# Altium PCB ChargeControl.PcbDoc
Units mm, origin at the board's own origin, x right, y up, seen from the top; angles counter-clockwise.
Board outline 97.57 x 83.47 mm, 2 copper layers (Top Layer, Bottom Layer); 27 components, 20 nets, 84 pads, 21 vias.
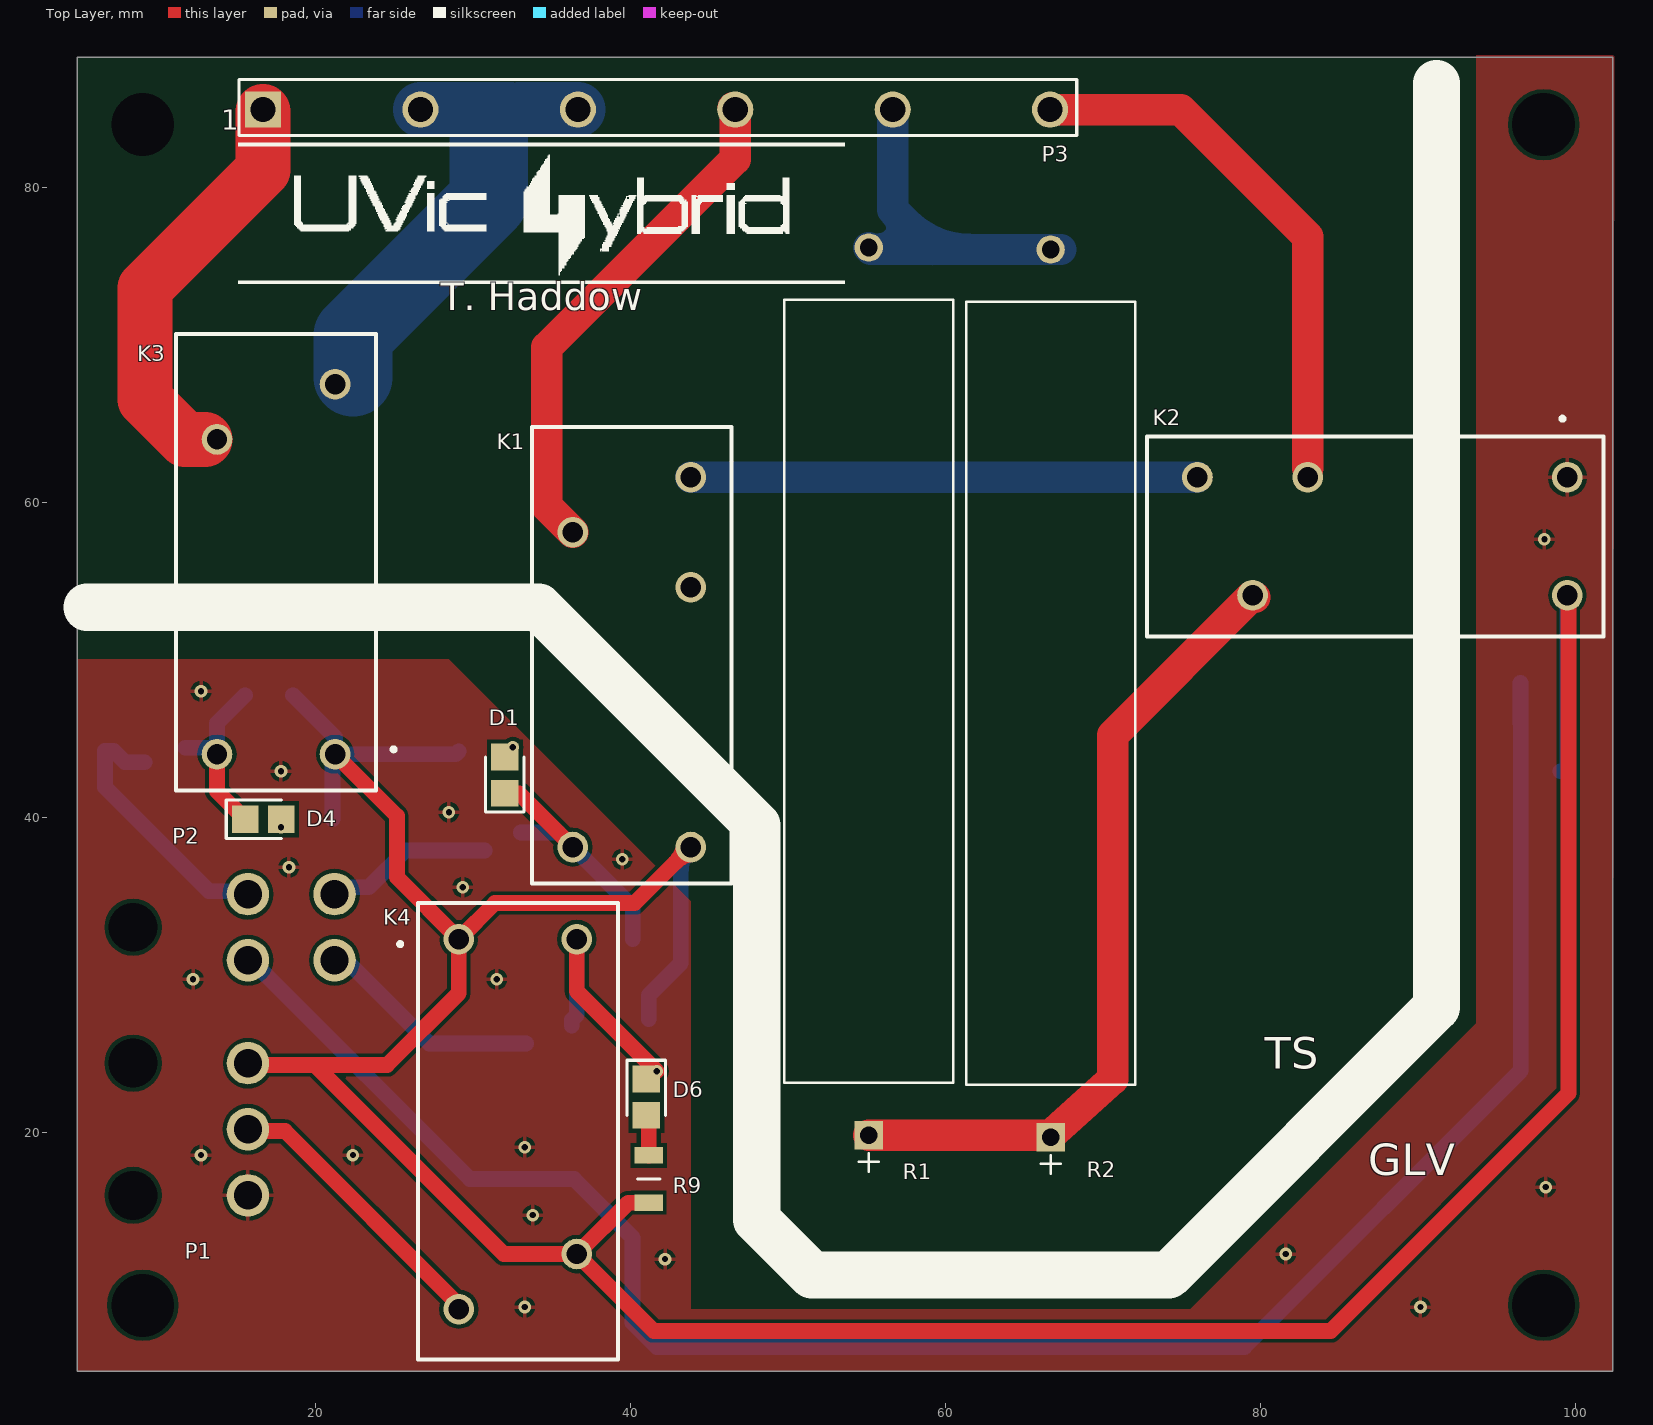
[diagram p0: Top Layer view]
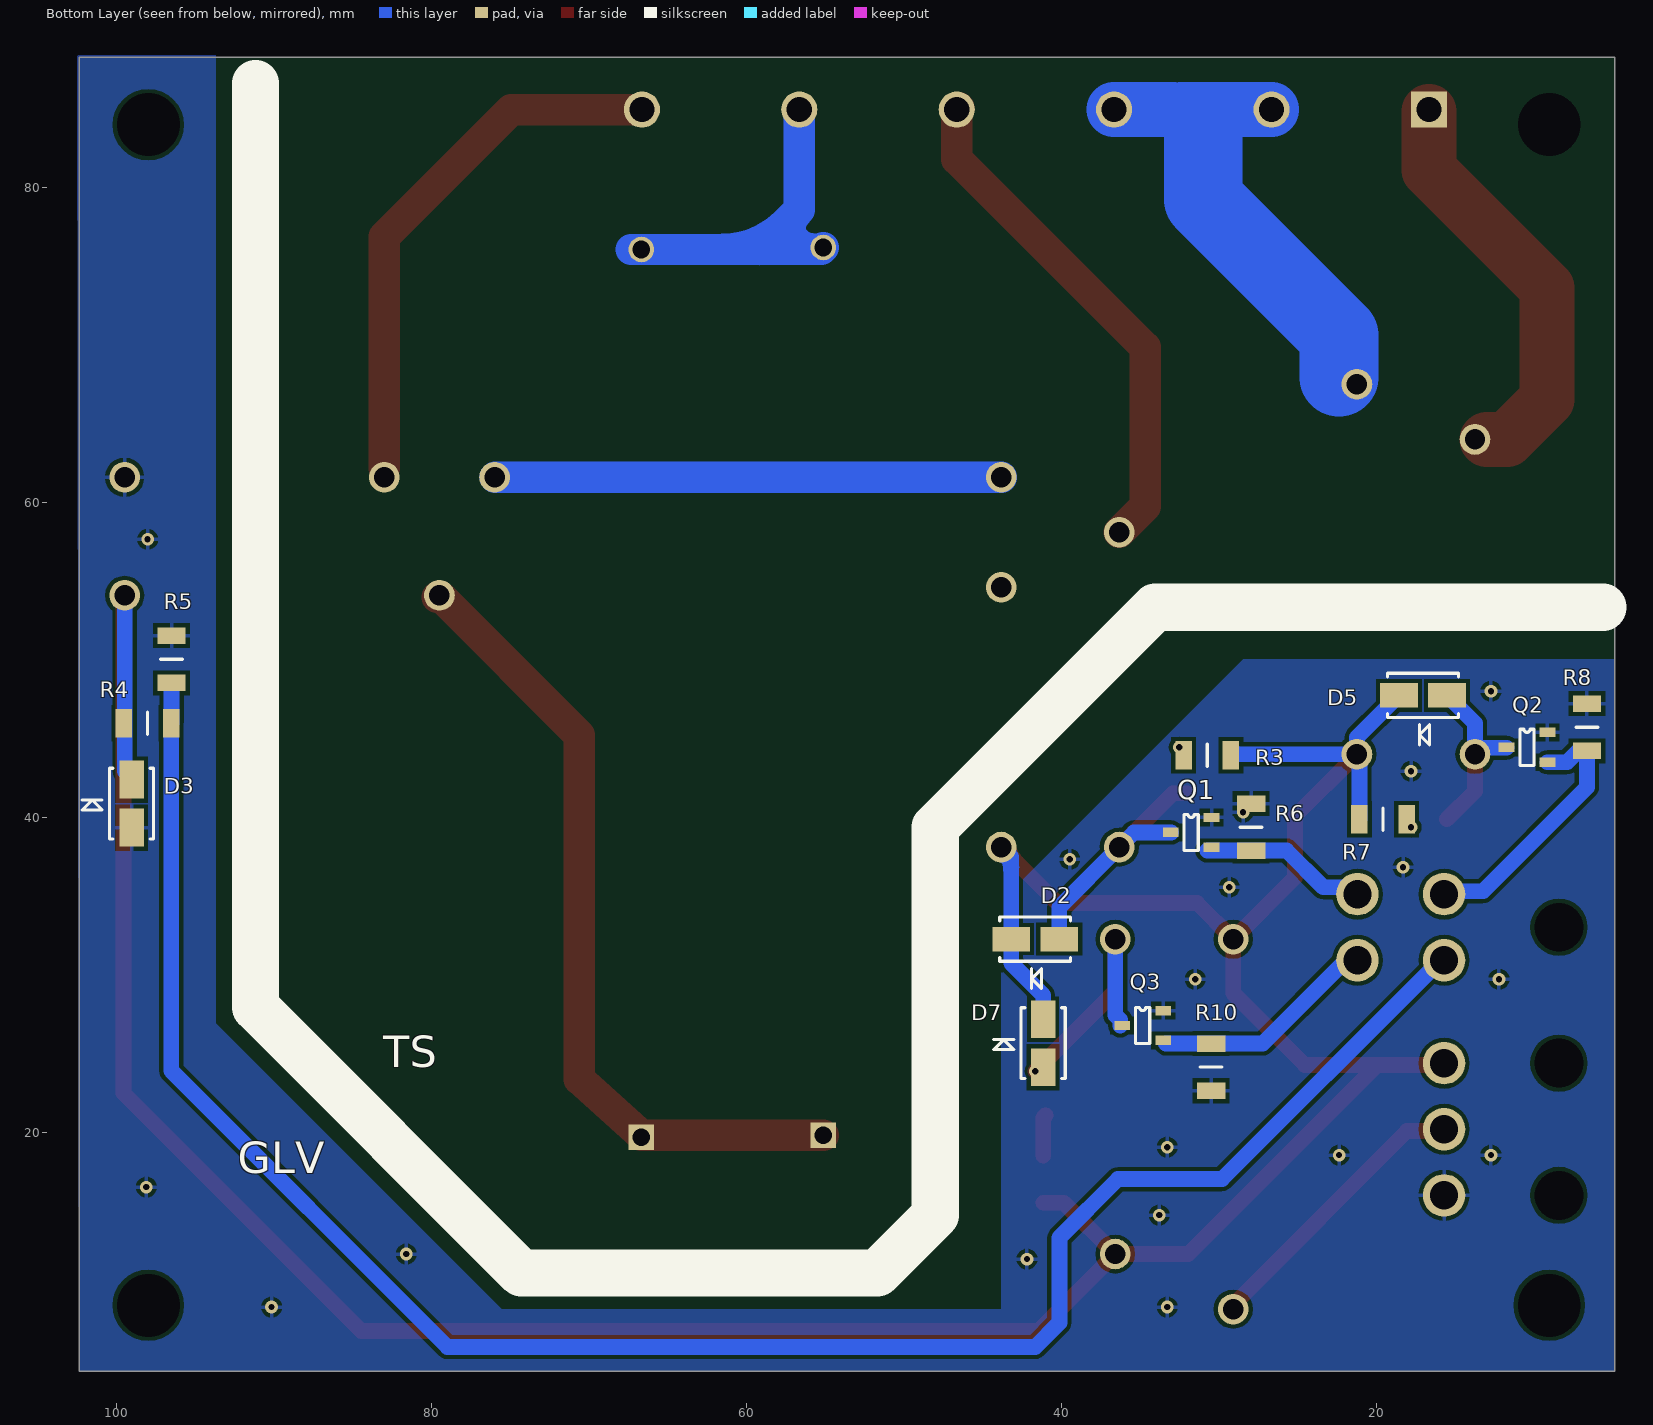
[diagram p1: Bottom Layer view, seen from below]
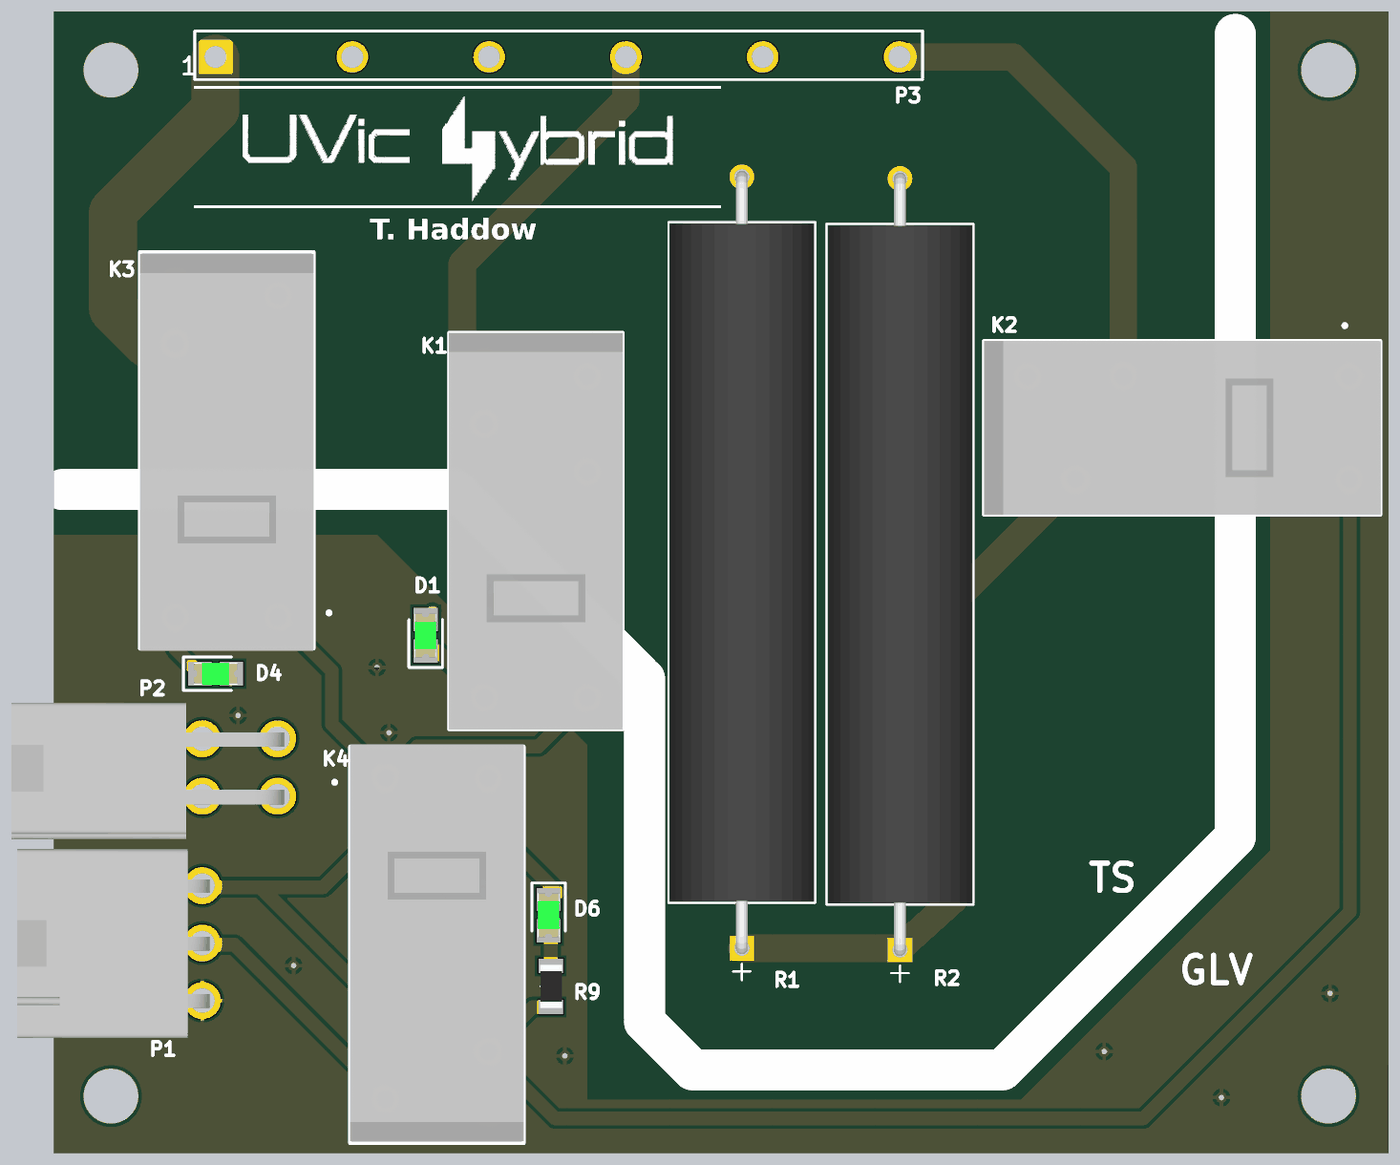
[diagram p2: 3D render of the assembled board from above, using the file's embedded part models]
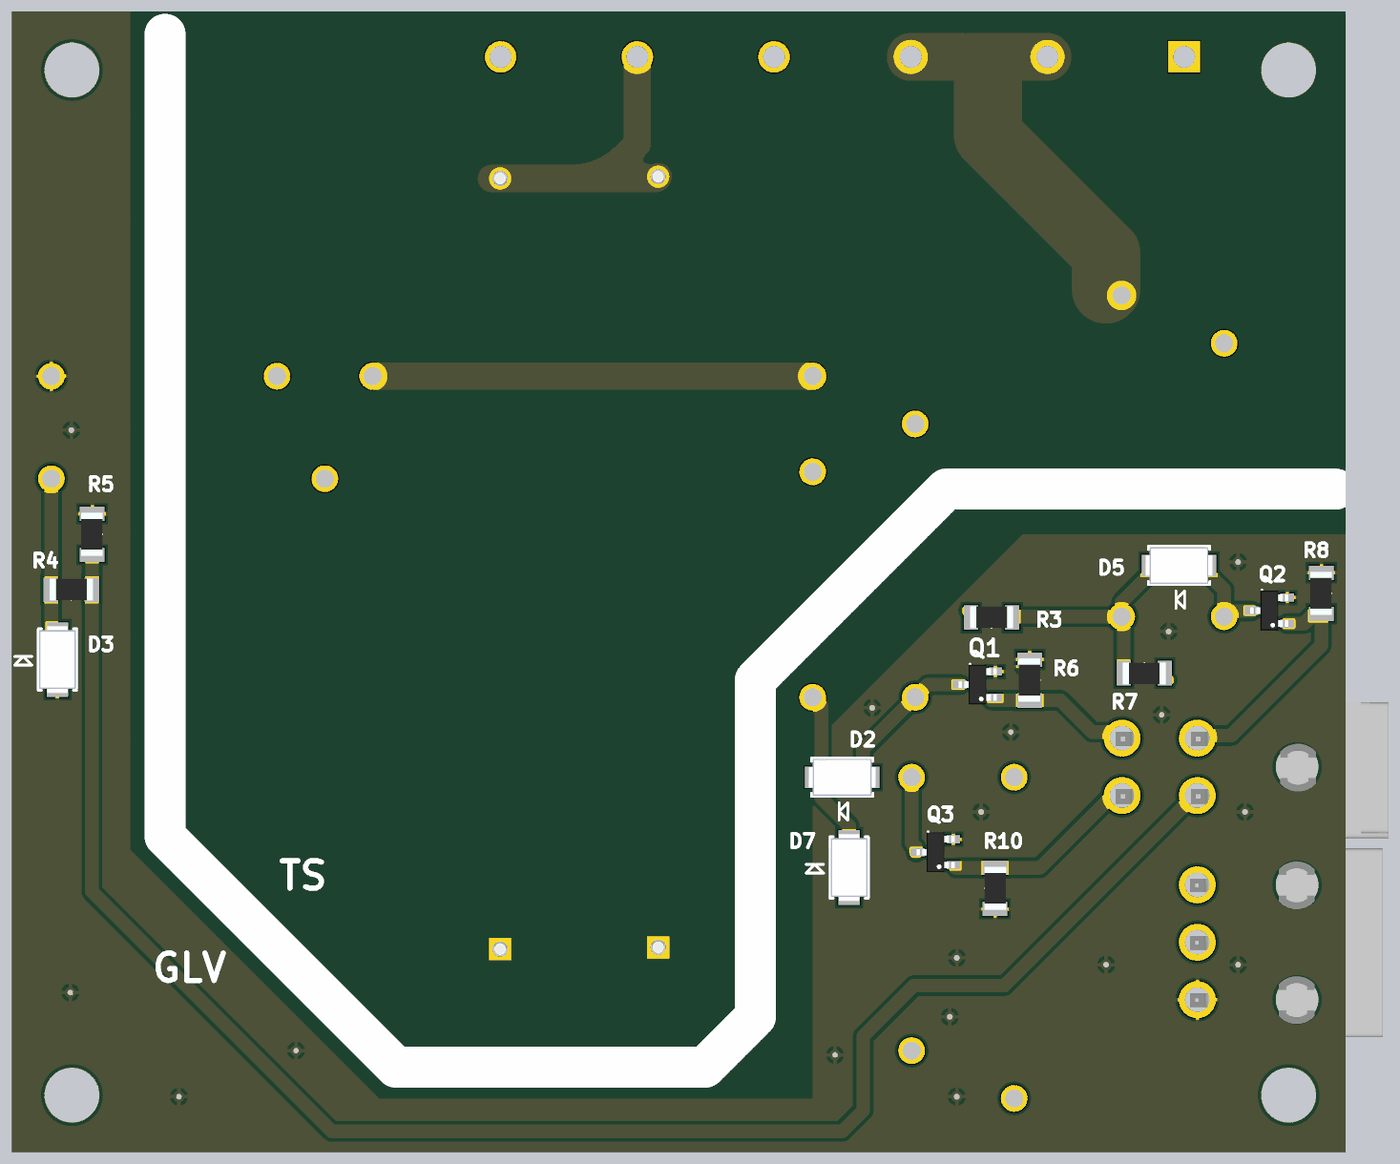
[diagram p3: 3D render of the assembled board from below, using the file's embedded part models]

## Layer stack, top to bottom
Top Solder: solder mask 0.0102, Solder Resist, Dk 3.5
Top Layer: signal copper 0.0356
Dielectric 1: dielectric 0.32, FR-4, Dk 4.8
Bottom Layer: signal copper 0.0356
Bottom Solder: solder mask 0.0102, Solder Resist, Dk 3.5

## Board outline
4.826,4.826 4.826,88.298 102.396,88.298 102.396,4.826

## Design rules (kind name [scope] priority, off if disabled: settings)
Clearance [All] p1: gap=0.254 ignorepadtopadclearanceinfootprint=FALSE except(0: Arc-Hole Track-Hole SMDPad-Hole THPad-Hole Via-Hole Fill-Hole Poly-Hole Region-Hole Text-Hole)
HoleSize [All] p1: absolutevalues=TRUE maxlimit=5 minlimit=0.3 maxpercent=80.000 minpercent=20.000
MinimumSolderMaskSliver [All] p1: minsoldermaskwidth=0.15
PolygonConnect [All] p1: connectstyle=Relief reliefconductorwidth=0.254 reliefentries=4 polygonreliefangle="90 Angle" airgapwidth=0.254
RoutingVias [All] p1: holewidth=0.711 width=1.27 viastyle="Through Hole" minholewidth=0.711 minwidth=1.27 maxholewidth=0.711 maxwidth=1.27
SilkToSilkClearance [All] p1: silktosilkclearance=0.1
SilkToSolderMaskClearance [IsPad] p1: minsilkscreentomaskgap=0.1 clearancetoexposedcopper=TRUE
SolderMaskExpansion [All] p1: expansion=0.1
Width [All] p1: maxlimit=5 minlimit=1 preferedwidth=2 minimp=50.000000 maximp=50.000000 favimp=50.000000
26 further rules are at their usual default settings.

## Components (designator, comment, footprint, x,y, rotation, side; value= is the part's Value field where it differs from the comment)
D1 "LED0" LEDC3216X120NGRN 32.004,42.679 r90 top
D2 "Diode" VISH-DO-214AC-SMA-2_N 41.656,32.258 r0 bottom
D3 "Diode" VISH-DO-214AC-SMA-2_N 99.06,40.87 r90 bottom
D4 "LED0" LEDC3216X120NGRN 16.653,39.878 r0 top
D5 "Diode" VISH-DO-214AC-SMA-2_N 17.018,47.752 r0 bottom
D6 "LED0" LEDC3216X120NGRN 40.994,22.222 r270 top
D7 "Diode" VISH-DO-214AC-SMA-2_N 41.148,25.654 r90 bottom
K1 "Relay-SPDT" G2RL14 46.415,35.81 r90 top
K2 "Relay-SPDT" G2RL14 101.802,64.202 r180 top
K3 "Relay-SPST" G2RL1ADC12 23.816,41.708 r90 top
K4 "Relay-SPST" G2RL1ADC12 26.476,34.558 r270 top
P1 "Header 3" Conn3pin 8.382,24.384 r270 top
P2 "Header 4H" Conn4pin 15.682,35.12 r270 top
P3 "Header 6" Conn6pin 16.642,84.963 r0 top
Q1 "MOSFET-N" SOT23-3 31.75,39.04 r270 bottom
Q2 "MOSFET-N" SOT23-3 10.414,44.45 r270 bottom
Q3 "MOSFET-N" SOT23-3 34.828,26.775 r270 bottom
R1 "Res1" YAG_SQP10 55.118,76.2 r90 top value=1K
R2 "Res1" YAG_SQP10 66.675,76.073 r90 top value=1K
R3 "1206" RESC3216X60N 30.722,43.942 r0 bottom value=500
R4 "Res3" RESC3216X60N 98.044,45.974 r0 bottom value=698K
R5 "Res3" RESC3216X60N 96.52,50.038 r270 bottom value=499K
R6 "1206" RESC3216X60N 27.94,39.37 r270 bottom value=1M
R7 "1206" RESC3216X60N 19.558,39.878 r180 bottom value=500
R8 "1206" RESC3216X60N 6.604,45.72 r270 bottom value=1M
R9 "1206" RESC3216X60N 41.148,17.018 r90 top value=500
R10 "1206" RESC3216X60N 30.48,24.13 r90 bottom value=1M

## Footprints (in the part's own frame and the unit in brackets; to place one, negate y for a bottom-side part, rotate by r counter-clockwise, add the part's x,y. Pads: shape width x height; smd on the part's side, far side on the other; paste and mask are expansions set on the pad)
Conn3pin [mm]
  round 2.7 hole 1.8: 1(0,7.3) 2(4.2,7.3) 3(8.4,7.3)
  round 2.3 hole 3.1: 4(0,0) 5(8.4,0)
  body extent -4.57,-6.22 11.13,7.83, height 10.49
Conn4pin [mm]
  round 2.7 hole 1.8: 1(0,5.5) 2(4.2,5.5) 3(0,0) 4(4.2,0)
  round 2.3 hole 3.1: 5(2.1,-7.3)
  body extent -4.57,-13.97 7.36,5.97, height 11.01
Conn6pin [mm]
  rect 2.3x2.3 hole 1.6: 1(0,0)
  round 2.3 hole 1.6: 2(10,0) 3(20,0) 4(30,0) 5(40,0) 6(50,0)
  silkscreen extent -1.52,-1.65 51.69,1.91
G2RL1ADC12 [mm]
  round 1.95 hole 1.3: 1(2.3,2.6) 3(25.8,2.6) 4(22.3,10.1) 5(2.3,10.1)
  silkscreen extent 0,-1.25 29,12.7, body extent -0.15,0 28.85,12.7, height 15.31
G2RL14 [mm]
  round 1.95 hole 1.3: 1(2.3,2.6) 2(18.8,2.6) 3(25.8,2.6) 4(22.3,10.1) 5(2.3,10.1)
  silkscreen extent 0,-1.25 29,12.7, body extent -0.02,0 28.98,12.7, height 15.31
LEDC3216X120NGRN [mm]
  rect 1.7x1.75 smd: 1(1.15,0) 2(-1.15,0)
  silkscreen extent -2.35,-1.22 1.15,1.22, body extent -1.6,-0.8 1.6,0.8, height 1.1
RESC3216X60N [mm]
  rect 1.05x1.8 smd: 1(-1.5,0) 2(1.5,0)
  silkscreen extent 0,-0.7 0,0.7, body extent -1.57,-0.83 1.58,0.77, height 1.2
SOT23-3 [mm]
  round 0.2 on Bottom Overlay: 1(-1.5,-0.55)
  rect 0.6x1 smd: 1(0,-1.3) 2(0.95,1.3) 3(-0.95,1.3)
  silkscreen extent -1.15,-0.45 1.15,0.45, body extent -1.45,-1.4 1.45,1.4, height 1.3
VISH-DO-214AC-SMA-2_N [mm]
  rect 2.4x1.55 smd: 1(-1.525,0) 2(1.525,0)
  silkscreen extent -2.25,-1.4 2.25,3.14, body extent -2.5,-1.35 2.5,1.35, height 2.2
YAG_SQP10 [mm]
  rect 1.8x1.8 / inner rect 1.626x1.626 / far side rect 1.626x1.626 hole 1.118 mask+0: 1(-56.388,0)
  round 1.8 / inner round 1.626 / far side round 1.626 hole 1.118 mask+0: 2(0,0)
  silkscreen extent -58.72,-5.37 -3.31,5.37, body extent -56.82,-5.24 0.43,5.25, height 10.49

## Part data
D1 D4 D6: "Typical INFRARED GaAs LED", Supplier Part Number 1=732-4993-1-ND, LatestRevisionDate=08-Jul-2005, LatestRevisionNote="Mech Layer 1 removed.", PackageDescription="LED; 2 Leads", PackageReference=LED-0, Published=8-Jun-2000, Publisher="Altium Limited", Supplier 1=Digi-Key
D2 D3 D5 D7: "Switching diode", Supplier Part Number 1=S1G-E3/61TGICT-ND, Code_JEDEC=DO-214-AB, LatestRevisionDate=17-Jul-2002, LatestRevisionNote="Re-released for DXP Platform.", PackageDescription="DO-214-AB/SMC; 2 C-Bend Leads; Body 7.9 x 5.9 mm, inc. leads (LxW)", PackageReference=SMC, PackageVersion=Sep-1996, Published=8-Jun-2000, Publisher="Altium Limited", Supplier 1=Digi-Key
K1 K2: "Single-Pole Dual-Throw Relay", Supplier Part Number 1=Z3076-ND, LatestRevisionDate=17-Jul-2002, LatestRevisionNote="Re-released for DXP Platform.", PackageReference=MODULE5B, Published=24-Mar-1999, Publisher="Altium Limited"
  K2: Supplier=Digikey
K3 K4: "Single-Pole Single-Throw Relay", Supplier Part Number 1=Z3080-ND, LatestRevisionDate=17-Jul-2002, LatestRevisionNote="Re-released for DXP Platform.", PackageReference=MODULE4, Published=24-Mar-1999, Publisher="Altium Limited"
P1: "3 pos wire to board", Supplier Part Number 1=WM18446-ND, LatestRevisionDate=17-Jul-2002, LatestRevisionNote="Re-released for DXP Platform.", Publisher="Altium Limited", Supplier Part Number 2=WM18434-ND
P2: "Header, 4-Pin, Right Angle", Supplier Part Number 1=WM21352-ND, LatestRevisionDate=17-Jul-2002, LatestRevisionNote="Re-released for DXP Platform.", Publisher="Altium Limited", Supplier Part Number 2=WM3701-ND
P3: "Header, 6-Pin", LatestRevisionDate=17-Jul-2002, LatestRevisionNote="Re-released for DXP Platform.", Publisher="Altium Limited"
Q1 Q2 Q3: "N-Channel MOSFET", Supplier Part Number 1=SSM3K329RLFCT-ND, LatestRevisionDate=17-Jul-2002, LatestRevisionNote="Re-released for DXP Platform.", PackageDescription="TO, Flat Index; 3 In-Line, Axial Leads; Body Dia. 4.6mm; Lead Dia. 0.5 mm (max)", PackageReference=E3, PackageVersion=1995/1996, Published=8-Jun-2000, Publisher="Altium Limited", Supplier 1=Digi-Key
R1 R2: "Resistor", Supplier Part Number 1=1.0KW-10-ND, LatestRevisionDate=17-Jul-2002, LatestRevisionNote="Re-released for DXP Platform.", PackageDescription="Axial Device, Thru-Hole; 2 Leads; 0.3 in Pin Spacing", PackageReference=AXIAL-0.3, Published=8-Jun-2000, Publisher="Altium Limited"
R3 R7 R9: library part Res1, "Resistor", Supplier Part Number 1=RNCP1206FTD511RCT-ND, LatestRevisionDate=17-Jul-2002, LatestRevisionNote="Re-released for DXP Platform.", PackageDescription="Axial Device, Thru-Hole; 2 Leads; 0.3 in Pin Spacing", PackageReference=AXIAL-0.3, Published=8-Jun-2000, Publisher="Altium Limited", Supplier 1=Digi-Key
R4 R5: "Resistor", LatestRevisionDate=29-May-2009, LatestRevisionNote="IPC-7351 Footprint Added.", PackageDescription="Chip Resistor", PackageReference=J1-0603, Published=8-Jun-2000, Publisher="Altium Limited"
R6 R8 R10: library part Res1, "Resistor", Supplier Part Number 1=RG3216P-1004-B-T1, LatestRevisionDate=17-Jul-2002, LatestRevisionNote="Re-released for DXP Platform.", PackageDescription="Axial Device, Thru-Hole; 2 Leads; 0.3 in Pin Spacing", PackageReference=AXIAL-0.3, Published=8-Jun-2000, Publisher="Altium Limited", Supplier 1=Digi-Key

## Free pads (board coordinates)
  round 1.524 hole 4: 0(9,9) 0(9,84) 0(98,9) 0(98,84)

## Via types
v1: diameter 0.8, hole 0.4, Top Layer to Bottom Layer, tented both sides, 21 vias

## Nets (pads, with @x,y where several pads share a name; then routed paths per layer and width w, separated by ;. In a path a pad name is that pad's centre, name@x,y a point inside that pad or via, vN(x,y) a via of type N, cw(c..) or ccw(c..) an arc to the next point about the centre after c; other vN are vias at no path point)
AIR+: K4.3 P1.2 | length 17.4
  Top Layer w1: P1.2@16.51,20.066 18.034,20.066 29.076,9.024 K4.3
CHARGE: P2.3 Q2.2 R8.2 | length 17
  Bottom Layer w1: Q2.2 7.874,43.5 7.154,44.22 R8.2 6.604,41.91 13.208,35.306 P2.3@15.705,35.306
CTRLAIR+: P2.2 Q3.2 R10.2 | length 14.2
  Bottom Layer w1: P2.2@21.336,30.988 21.844,30.988 27.202,25.63 R10.2 Q3.2@33.345,25.63
GND: D3.1 K2.1 P1.3 Q1.3 Q2.3 Q3.3 R5.1 R6.1 R8.1 R10.1
  other v1: 33.274,8.89 90.17,8.89 42.177,11.938 81.61,12.258 33.782,14.732 98.12,16.51 12.7,18.542 22.352,18.542 33.274,19.05 12.192,29.718 31.496,29.718 29.326,35.56 18.288,36.83 39.456,37.338 28.448,40.329 17.78,42.926 12.7,48.006 98.044,57.658
MIDCHARGER: K3.3 P3.2 P3.3 | length 29.1
  Bottom Layer w3.5: P3.2 32.345,84.963 ; 32.915,84.963 P3.3
  Bottom Layer w5: 22.352,67.954 22.352,70.612 30.988,79.248 30.988,84.074
MIDPACK: K3.4 P3.1 | length 26.3
  Top Layer w3.5: K3.4@12.954,64.008 11.684,64.008 9.144,66.548 9.144,73.63 16.642,81.128 P3.1@16.642,84.836
MIDPACK_ALLOWED: P2.4 R4.1 R5.2 | length 124.8
  Bottom Layer w1: P2.4@16.653,30.158 29.793,17.018 36.398,17.018 40.119,13.297 40.119,7.887 41.656,6.35 78.994,6.35 96.544,23.9 R4.1 96.52,45.998 R5.2
NetD1_1: D1.1 R3.2
  other v1: 32.512,44.45
NetD1_2: D1.2 D2.1 K1.5 Q1.1@33.05,39.04 | length 16.8
  Top Layer w1: D1.2 32.896,41.529 K1.5
  Bottom Layer w1: Q1.1@33.02,39.04 33.05,39.04 35.385,39.04 K1.5 40.131,34.294 D2.1
NetD4_1: D4.1 R7.2
  other v1: 17.78,39.37
NetD4_2: D4.2 D5.1 K3.5 Q2.1@11.714,44.45 | length 11.5
  Top Layer w1: K3.5 13.716,41.665 D4.2
  Bottom Layer w1: Q2.1@11.714,44.42 13.304,44.42 K3.5 13.716,44.42 13.716,45.975 D5.1
NetD6_1: D6.1 R9.2 | length 2.6
  Top Layer w1: D6.1 41.148,20.918 R9.2
NetD6_2: D6.2 D7.1 K4.5 Q3.1@36.128,26.775 | length 16.1
  Top Layer w1: K4.5 36.576,28.956 v1(41.656,23.876)
  Bottom Layer w1: Q3.1@36.259,26.775 36.259,27.122 36.576,27.439 K4.5
NetK1_3: K1.3 K2.3 | length 32.1
  Bottom Layer w2: K1.3@43.815,61.595 K2.3@75.946,61.595
NetK2_4: K2.4 R1.1 R2.1 | length 51.4
  Top Layer w2: R1.1 66.675,19.812 70.612,23.355 70.612,45.212 79.375,53.975 K2.4@79.629,53.975
PACK+: K1.4 P3.4 | length 32.7
  Top Layer w2: K1.4 34.671,59.754 34.671,69.85 46.642,81.821 P3.4 P3.4@46.515,85.09
PRECHARGED: P2.1 Q1.2 R6.2 | length 10.6
  Bottom Layer w1: P2.1@21.082,35.56 23.355,35.56 25.689,37.894 Q1.2@30.722,37.894
TS+: P3.5 R1.2 R2.2 | length 21.6
  Bottom Layer w2: R1.2 55.245,76.073 59.182,76.073 ; P3.5@56.642,84.422 56.642,78.613 59.182,76.073 ; R2.2@67.31,76.073 R2.2 59.182,76.073
TS-: K2.2 P3.6 | length 34.4
  Top Layer w2: P3.6@66.675,84.963 74.93,84.963 83.002,76.891 K2.2@83.002,62.166
"TSMS 12V": D2.2 D3.2 D5.2 D7.2 K1.1 K2.5 K3.1 K4.1 K4.4 P1.1 R3.1 R4.2 R7.1 R9.1 | length 221.6
  Top Layer w1: P1.1@16.256,24.266 19.93,24.266 ; K3.1 25.146,40.078 25.146,36.188 K4.1 ; R9.1 39.836,15.518 K4.4 ; K1.1 40.263,34.558 31.376,34.558 K4.1 ; K2.5@99.315,54.102 99.568,53.849 99.568,22.471 84.463,7.366 41.468,7.366 K4.4 ; 19.93,24.266 31.938,12.258 K4.4 ; 19.93,24.266 20.692,24.266 24.52,24.266 29.076,28.822 K4.1
  Bottom Layer w1: D5.2 21.216,45.079 K3.1 ; R7.1 21.058,43.85 K3.1 ; R3.1@29.076,44.196 28.888,44.008 K3.1 ; D7.2 41.148,28.702 43.181,30.735 D2.2 43.181,37.476 K1.1 ; D3.2@99.06,42.926 99.502,42.926 R4.2@99.502,45.932 ; K2.5 R4.2@99.502,45.932 ; R4.2 R4.2@99.502,45.932
pads on no net: K1.2 P1.4 P1.5 P2.5 Q1.1@32.3,40.54 Q2.1@10.964,45.95 Q3.1@35.378,28.275

## Polygon pours and split planes (outlines as drawn)
GND on Top Layer "Top Layer1-GND" (solid, pour order 4): 4.826,50.038 28.448,50.038 43.815,34.671 43.815,8.758 75.56,8.758 93.726,26.924 93.726,88.425 102.49,88.425 102.362,4.826 102.489,4.826 101.092,4.826 4.826,4.826
GND on Bottom Layer "Bottom Layer1-GND" (solid, pour order 8): 4.826,50.038 28.448,50.038 43.815,34.671 43.815,8.758 75.56,8.758 93.726,26.924 93.726,88.425 102.524,88.425 102.396,4.826 101.346,4.826 4.826,4.826

## Silkscreen, mask and mechanical layers (free items; w line width, h text height)
Top Overlay:
  drawing of 21 lines, arcs and shapes, not listed
  text "T. Haddow" at 27.94,71.628 h3
  text "TS" at 80.264,24.012 h2
  text "GLV" at 86.868,17.272 h2
Bottom Overlay:
  lines w3: 5.588,53.34 23.876,53.34 34.036,53.34 48.006,39.37 48.006,19.368 48.006,14.732 51.689,11.049 74.295,11.049 91.186,27.94 91.186,86.614
  text "TS" at 83.058,24.13 h2
  text "GLV" at 92.329,17.374 h2
Mechanical 20:
  the board outline again, w0.254

## Text inside footprints (layer, text, board x,y; h text height)
P3: Top Overlay "1" at 13.975,83.693 h1.27